# Altium PCB KOSVT-01.PcbDoc (part 2 of 2)
Units mm, origin at the board's own origin, x right, y up, seen from the top; angles counter-clockwise.
Board outline 70 x 45 mm, 4 copper layers (Top Layer, Layer 1, Layer 2, Bottom Layer), stack 0.954 mm thick; 78 components, 49 nets, 273 pads, 261 vias.
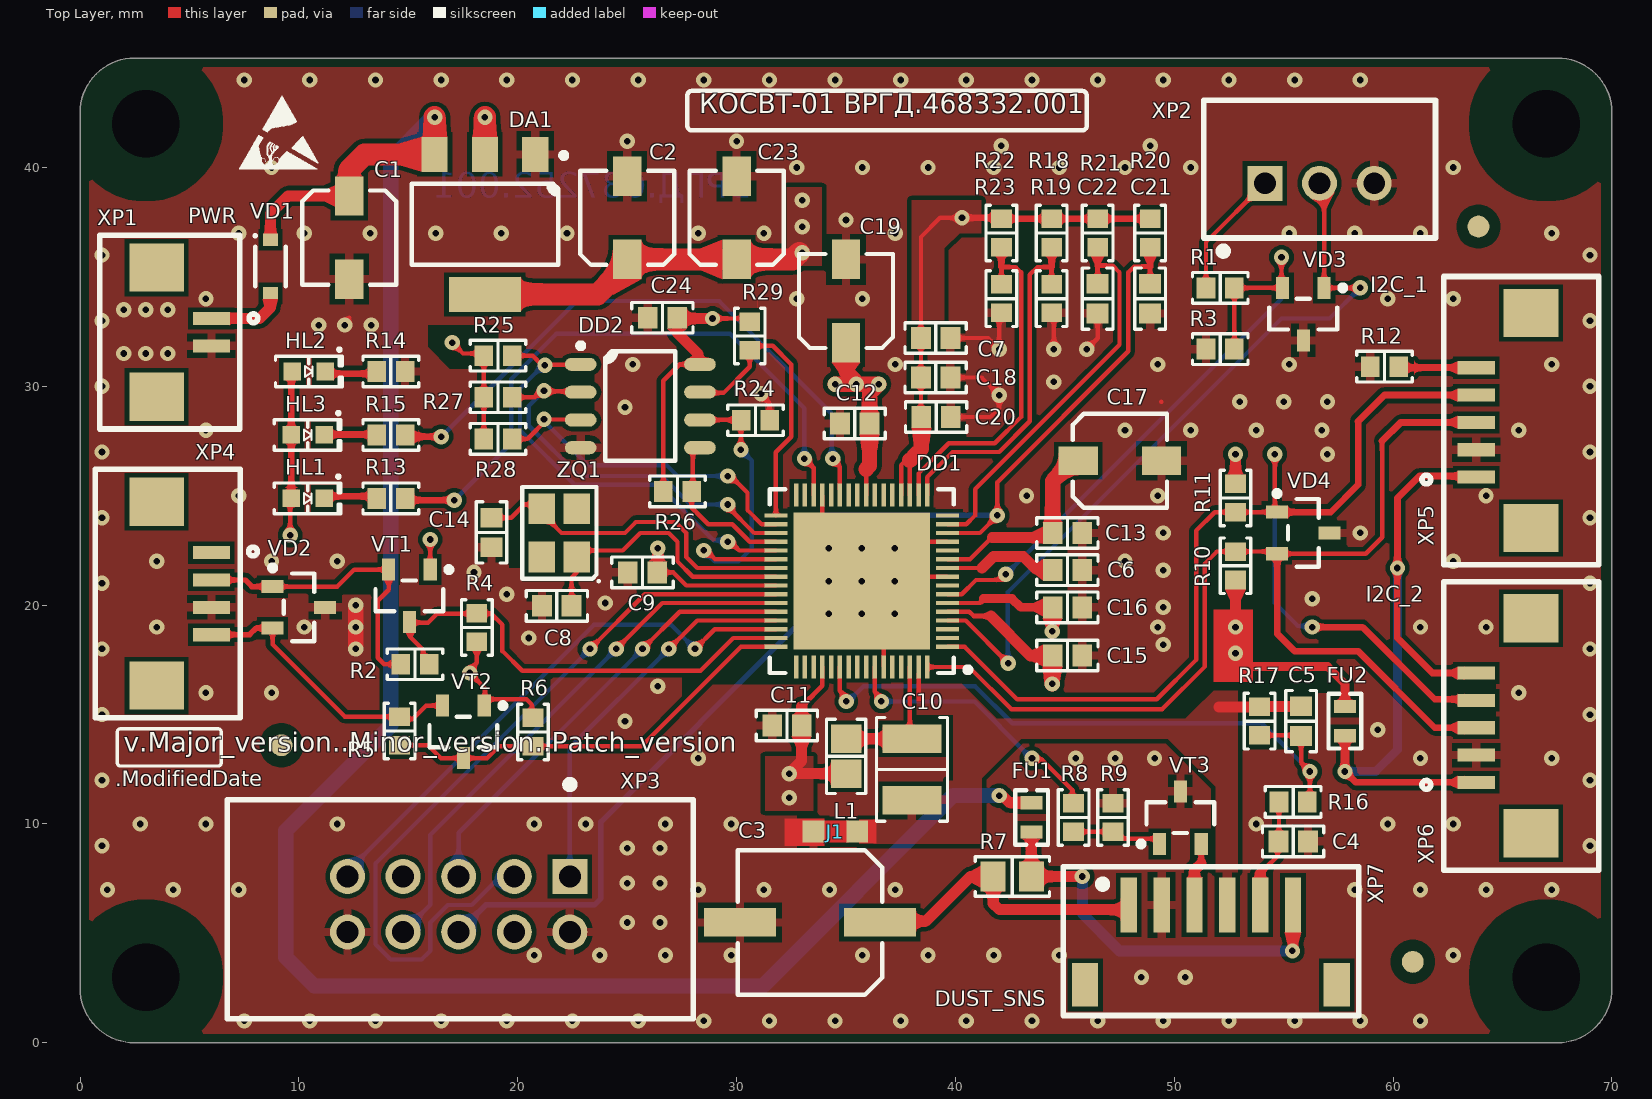
[diagram p0: Top Layer view]

## Polygon pours and split planes (outlines as drawn) (continued)
GND on Layer 1 (split plane): 67.695,44.482 67.889,44.454 68.078,44.406 68.262,44.34 68.439,44.257 68.607,44.156 68.764,44.04 68.908,43.908 69.04,43.764 69.156,43.607 69.257,43.439 69.34,43.262 69.406,43.078 69.454,42.889 69.482,42.695 69.491,42.516 69.49,42.5 69.49,2.5 69.491,2.484 69.482,2.305 69.454,2.111 69.406,1.922 69.34,1.738 69.257,1.561 69.156,1.393 69.04,1.236 68.908,1.092 68.764,0.96 68.607,0.844 68.439,0.743 68.262,0.66 68.078,0.594 67.889,0.546 67.695,0.518 67.516,0.509 67.5,0.51 2.5,0.51 2.484,0.509 2.305,0.518 2.111,0.546 1.922,0.594 1.738,0.66 1.561,0.743 1.393,0.844 1.236,0.96 1.092,1.092 0.96,1.236 0.844,1.393 0.743,1.561 0.66,1.738 0.594,1.922 0.546,2.111 0.518,2.305 0.509,2.484 0.51,2.5 0.51,42.5 0.509,42.516 0.518,42.695 0.546,42.889 0.594,43.078 0.66,43.262 0.743,43.439 0.844,43.607 0.96,43.764 1.092,43.908 1.236,44.04 1.393,44.156 1.561,44.257 1.738,44.34 1.922,44.406 2.111,44.454 2.305,44.482 2.484,44.491 2.5,44.49 67.5,44.49 67.516,44.491

## Other copper
Top Layer:
  rectangle net AGND: 35.6,9.1 36.4,10.2
  region net GND: 34.016,9 34.016,10.254 32.2,10.254 32.2,9
  region net GND: 34.018,25.025 33.818,25.025 33.818,24 34.018,24
  region net GND: 39.643,22.8 39.643,23 38.618,23 38.618,22.8
  region net GND: 39.643,21.2 39.643,21.4 38.618,21.4 38.618,21.2
  rectangle net GND: 36.618,17.175 36.818,18.2
  rectangle net +3V3: 51.8,16.5 53.6,19.8
  rectangle net AGND: 38.224,16.5 38.418,16.9
  rectangle net AGND: 38.224,15.6 38.418,16.5
  pour cut-out: 18.5,30.9 23.5,30.9 23.5,28.5 20.9,28.5 20.3,27.9 18.5,27.9
  pour cut-out: 56.6,19.1 56.6,18 58.7,18 62.2,14.5 64.7,14.5 64.7,17.2 60.3,17.2 58.4,19.1
  pour cut-out: 27.27,32.784 30.084,32.784 30.1,32.8 30.1,28 32,28 31.487,27.487 31.487,24.4 27.3,24.4 27.175,24.525
  pour cut-out: 13.8,19.3 13.7,19.2 13.7,15.1 14.4,15.1 16.2,13.3 21.5,13.3 21.5,14.7 21.5,15.6 21.5,16.6 19.908,16.6 18.7,17.808 18.7,19.3
  pour cut-out: 53.2,24.1 55.1,24.1 55.1,21.6 55.1,16.8 57.4,16.8 57.4,15.978 56.1,16.001 56.1,13.425 53.2,13.425 53.2,18.7
  pour cut-out: 43,22.9 45.1,22.9 45.1,18.2 45,18.2 43,18.2
  pour cut-out: 15.9,32.8 18.9,32.8 19.1,32.6 19.1,30.8 16.9,30.8 15.9,31.8
  pour cut-out: 12.3,21.4 13.864,21.4 14.407,21.4 14.551,21.4 14.551,19.3 13.5,19.3 13.5,20.5 11.5,20.5
  pour cut-out: 20.591,21.991 20.2,21.6 20.2,21.1 23.5,21.1 23.5,21.991
  pour cut-out: 19.606,24.369 21.369,24.369 21.4,24.4 21.4,21.7 19.6,21.7
  pour cut-out: 27.5,17.806 29.084,17.806 33.441,17.806 33.441,16.394 28.588,16.381 28.596,16.225 27.5,15.1 27.5,16.394
Bottom Layer:
  pour cut-out: 22.827,33.594 22.794,33.594 21.9,32.7 28.9,32.7 28.9,33.6
  pour cut-out: 19.9,28.7 20.9,28.7 22.3,27.3 22.3,25.3 22.1,25.3 21.3,26.1 19.9,27.5
  pour cut-out: 33.1,29.3 34.1,29.3 34.1,26.7 33.1,26.7
  pour cut-out: 21.826,27.006 21.194,26.473 22.367,25.3 26.8,25.3 29.794,22.306 30.394,22.306 30.394,26.473 30.367,26.5 27.3,26.5 24.5,26.5
  pour cut-out: 17.73,8.624 21.1,8.603 21.38,8.603 21.38,6.6 18.5,6.6 17.7,6.6
  pour cut-out: 17.1,8.5 17.1,9.495 16.994,9.6 21.194,13.8 22.7,13.8 26.5,17.6 22.3,17.6 13.2,8.5
  pour cut-out: 34.2,16.4 35,16.4 40.7,16.4 40.7,15.6 39.917,15 34.2,15 34.2,15.6
  pour cut-out: 17.85,39.85 17.85,37.9 31.35,37.9 31.35,39.85
  text "ВРГД.687252.001" at 30.7,38.222 h2
Layer 2 (plane layer: these items are gaps in the copper):
  lines w0.3: 24.75,22.45 26.8,20.4 30.695,20.4 32.952,22.657 34.745,24.45 34.995,24.7 37.5,24.7 43.5,18.7 44.2,18 45.7,18 45.7,21.7 36.2,31.2 34.4,31.2 31.4,28.2 31.4,25.4 31.4,22.5 30.9,22 30.4,21.5 28,21.5 27.4,22.1 27.4,22.9 26.7,23.6 25.9,23.6 24.75,22.45

## Silkscreen, mask and mechanical layers (free items; w line width, h text height)
Top Overlay:
  drawing of 20 lines, arcs and shapes, not listed
  text "КОСВТ-01 ВРГД.468332.001" at 28.3,42.192 h1.5
  text "PWR" at 4.95,37.45 h0.7
  text "I2C_1" at 58.962,34.3 h0.7
  text "I2C_2" at 58.75,20.167 h0.7
  text "v.Major_version..Minor_version..Patch_version" at 2,13 h1.5
  text ".ModifiedDate" at 1.6,11.5 h1.2
  text "DUST_SNS" at 39.05,1.667 h0.7
Bottom Overlay:
  text "Зав. №" at 30.7,36.5 h1.5
Board:
  the board outline again, w0.254